# Altium PCB StandaloneLeakDetector.PcbDoc
Units mil, origin at the board's own origin, x right, y up, seen from the top; angles counter-clockwise.
Board outline 1280 x 1360 mil, 2 copper layers (Top Layer, Bottom Layer); 12 components, 7 nets, 37 pads, 4 vias.
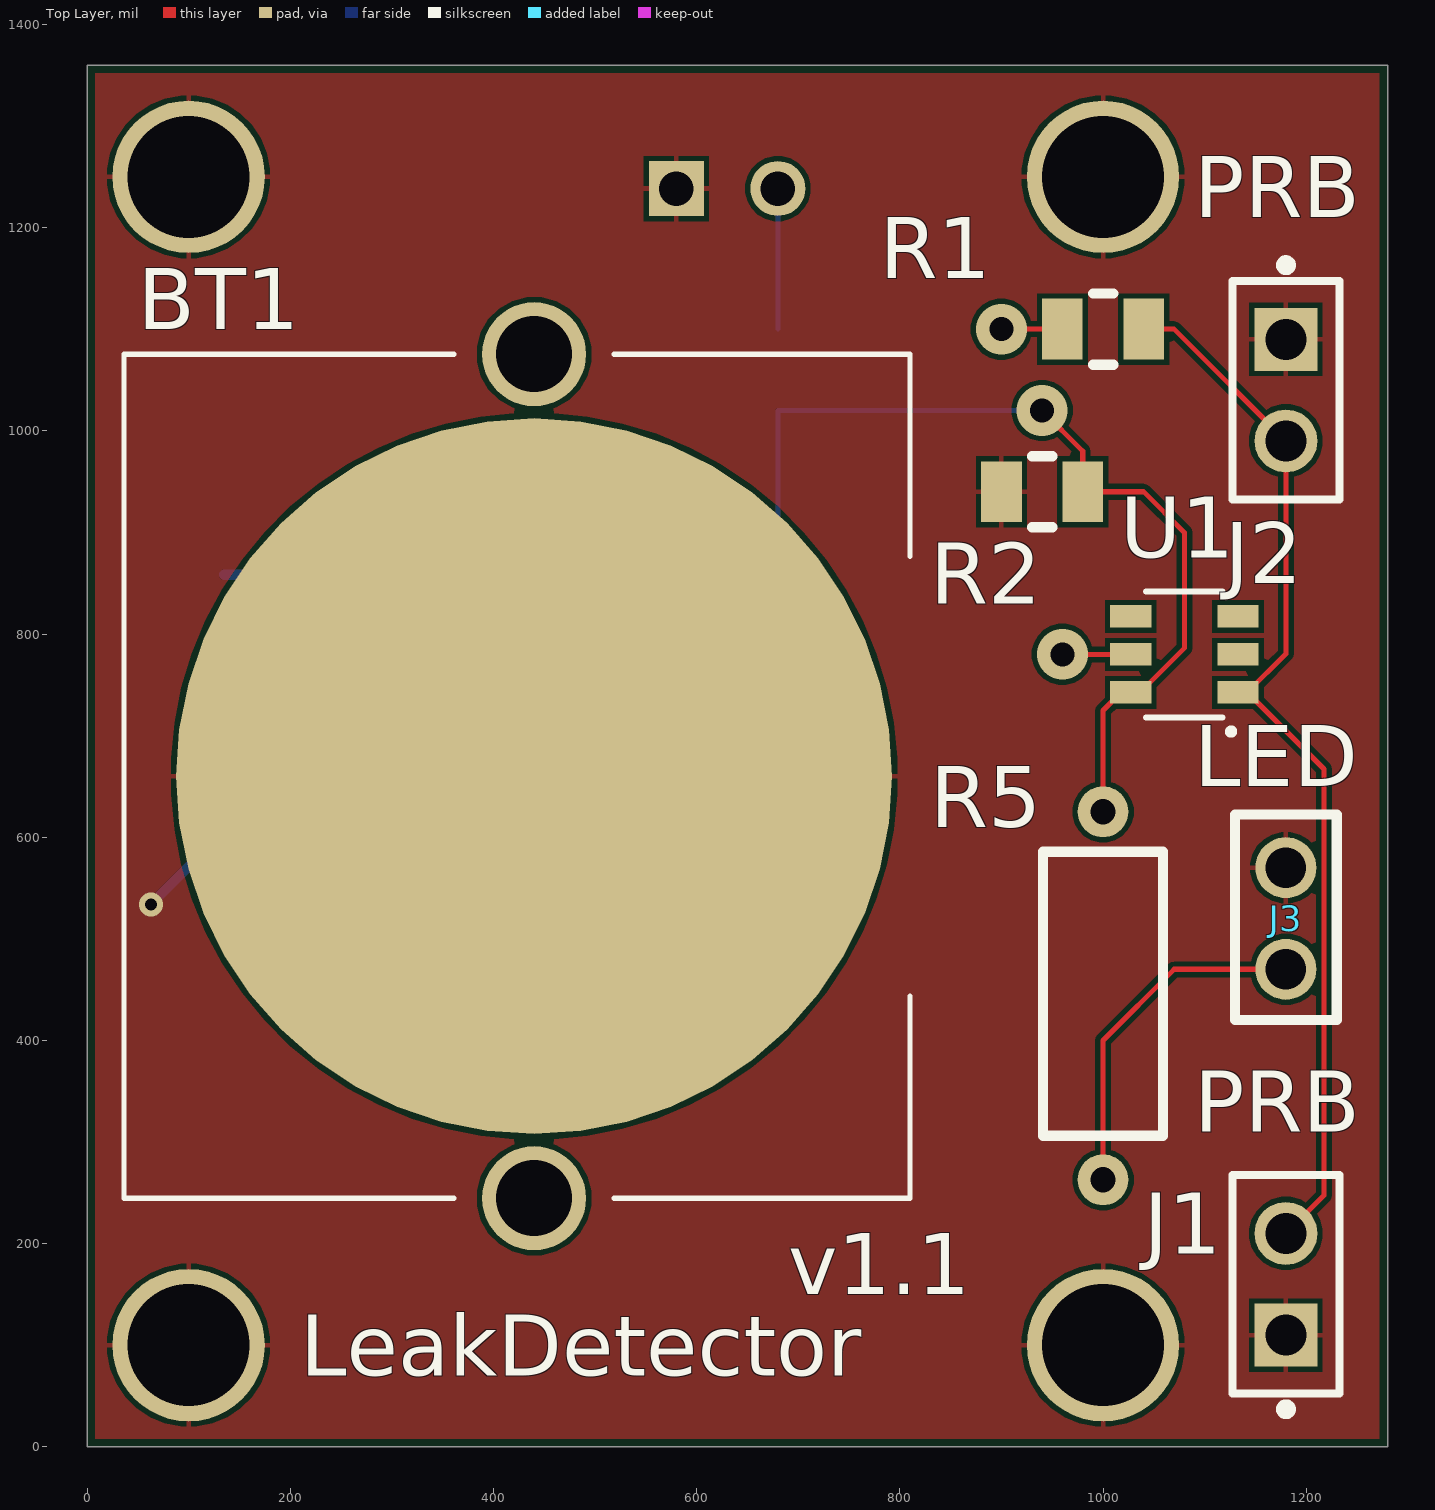
[diagram p0: Top Layer view]
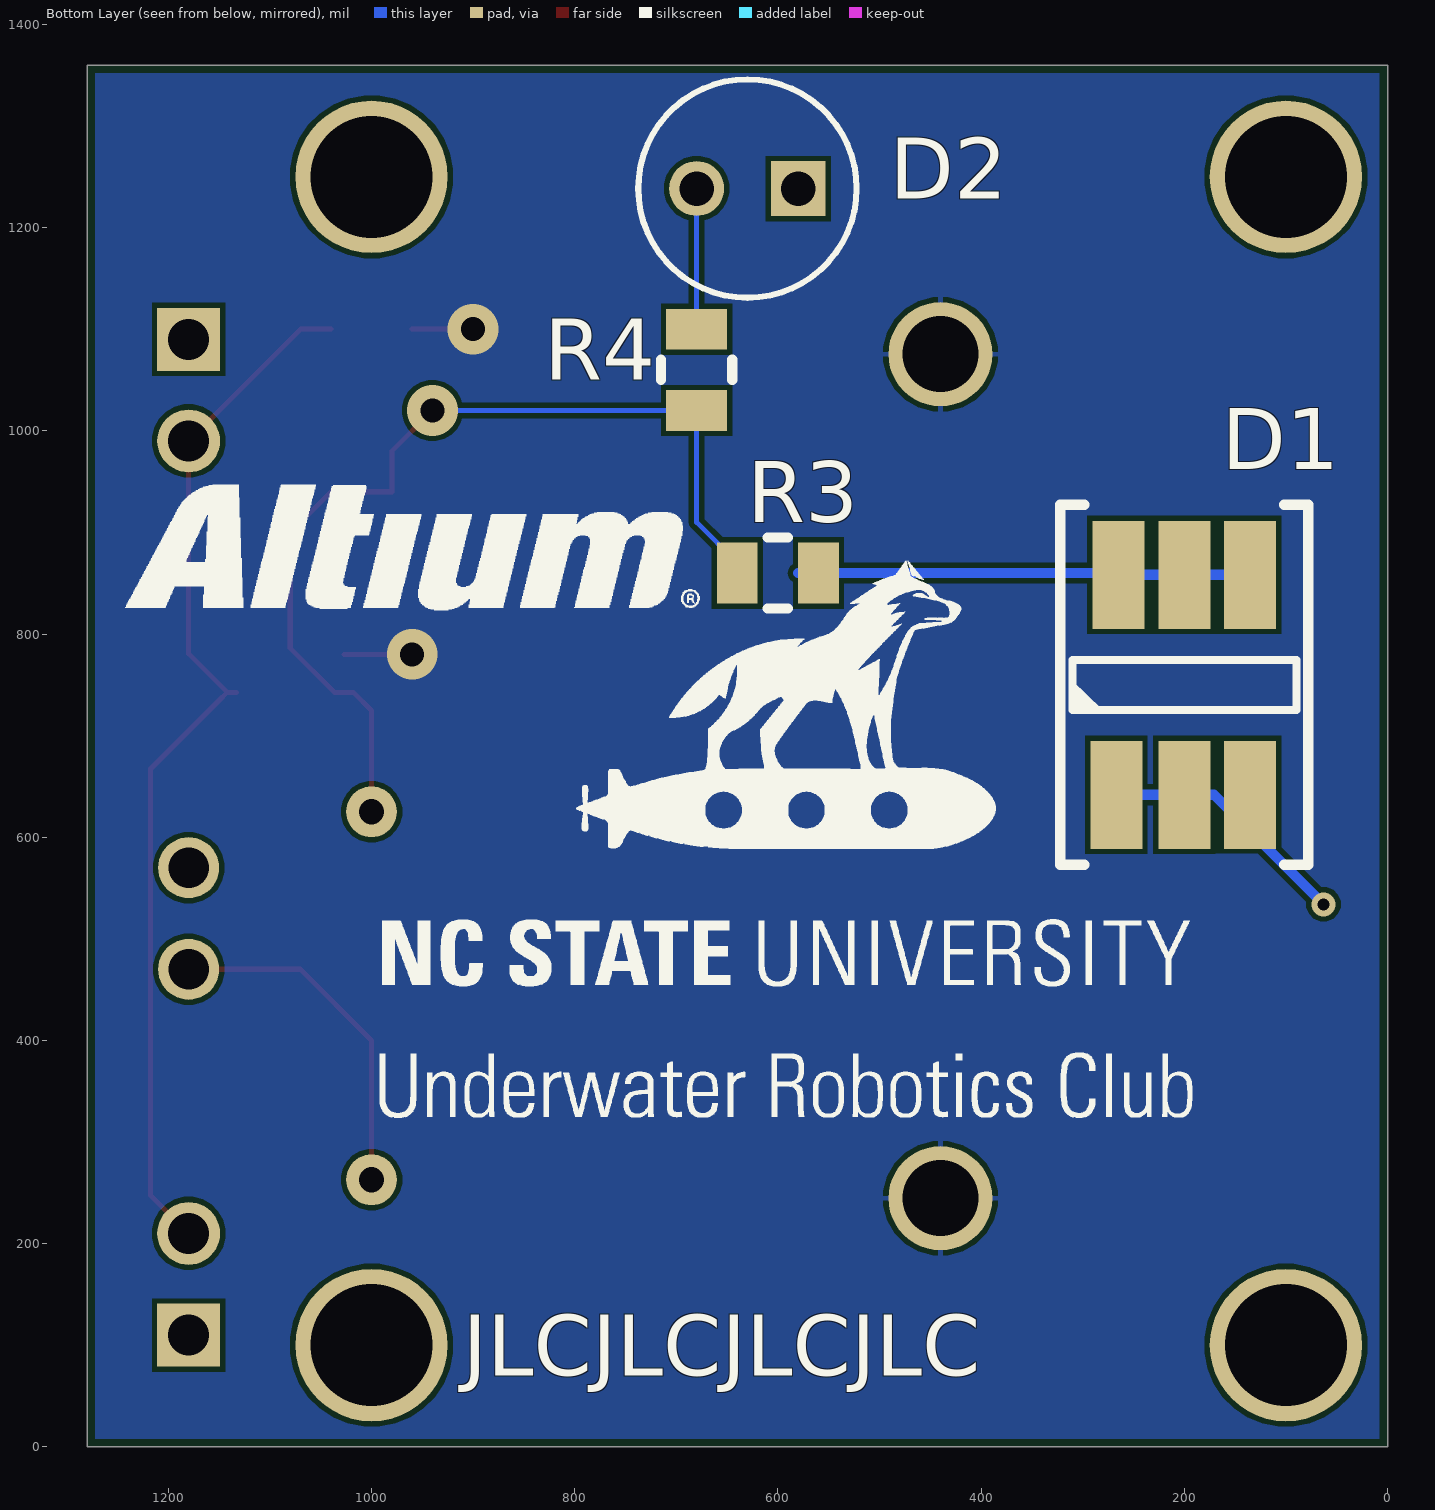
[diagram p1: Bottom Layer view, seen from below]
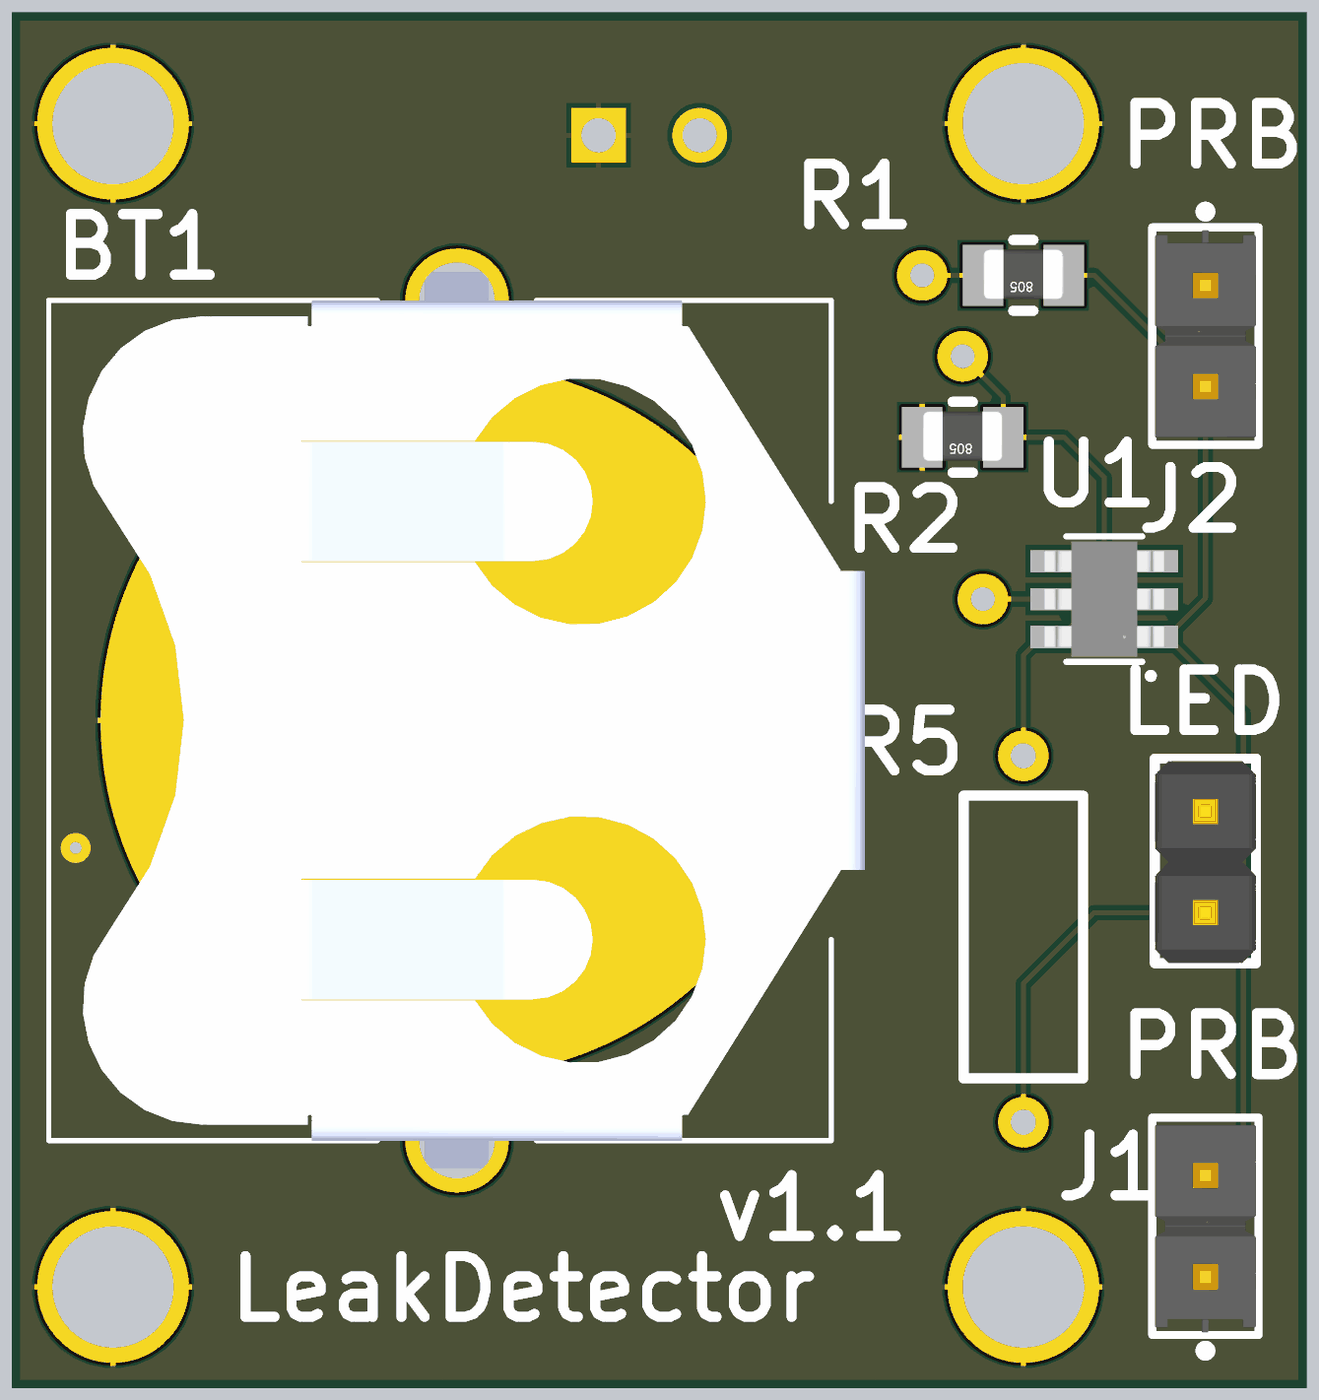
[diagram p2: 3D render of the assembled board from above, using the file's embedded part models]
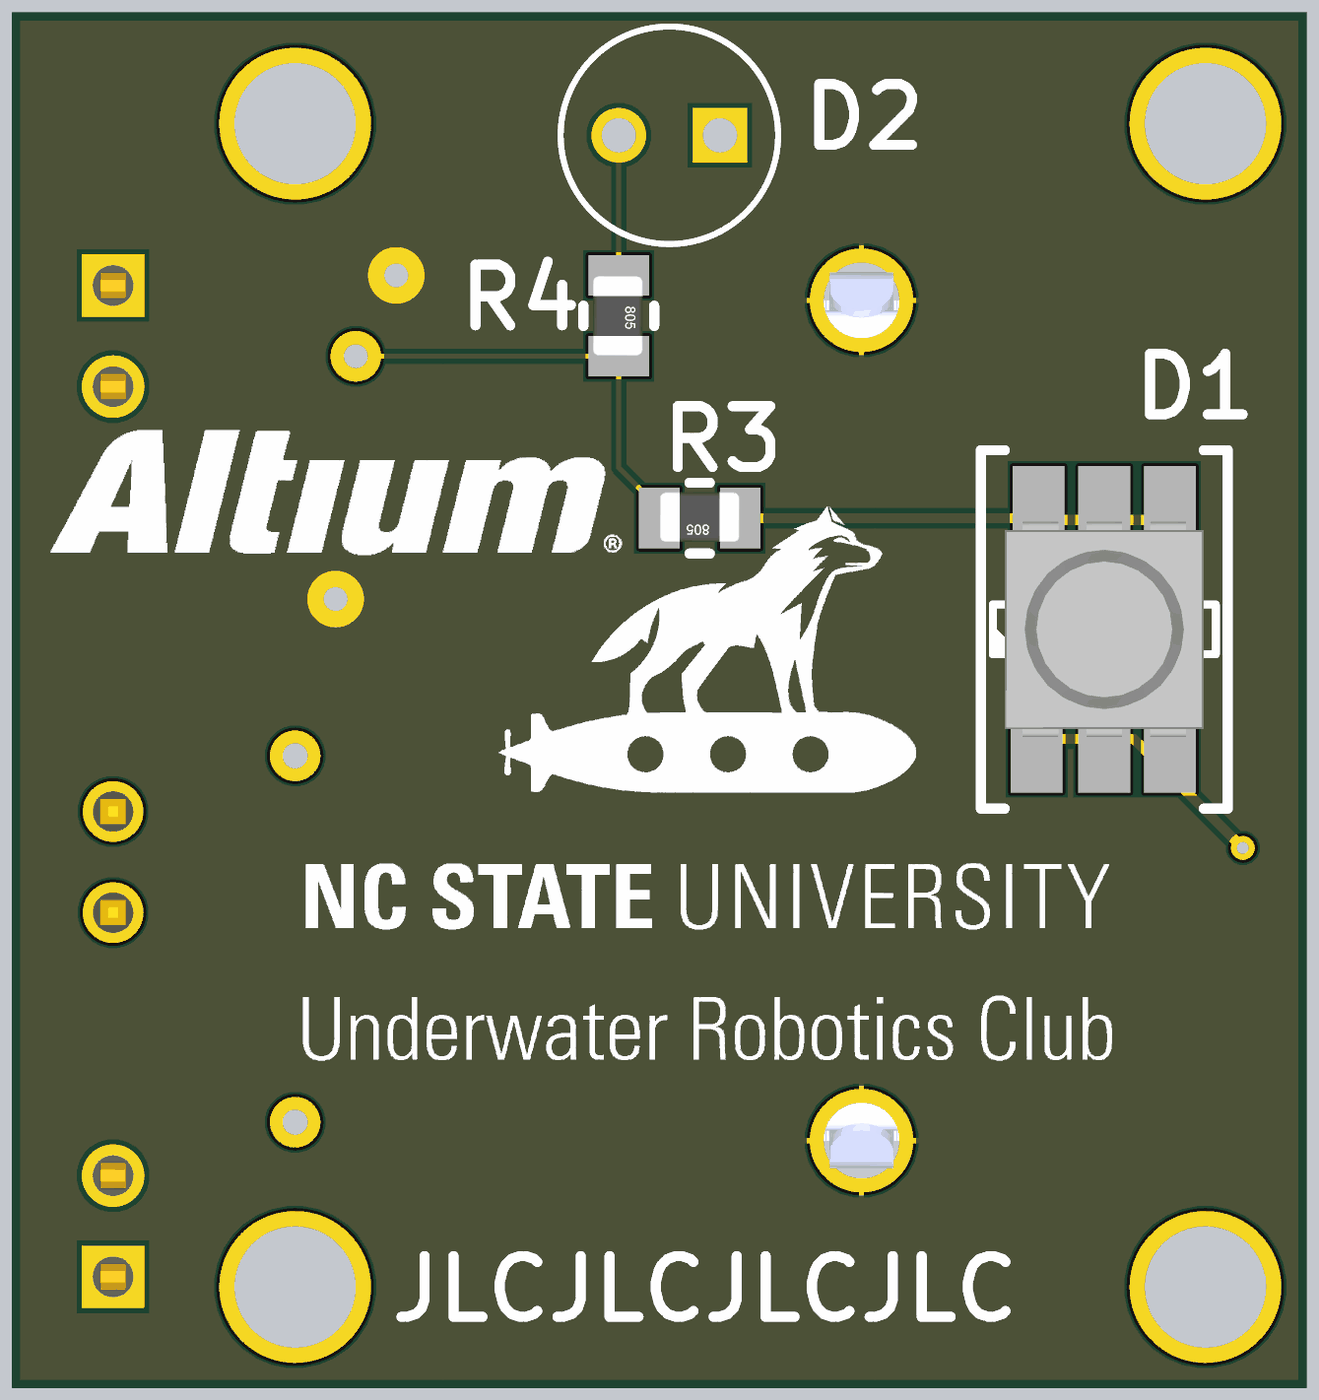
[diagram p3: 3D render of the assembled board from below, using the file's embedded part models]

## Layer stack, top to bottom
Top Solder: solder mask 0.4, Solder Resist, Dk 3.5
Top Layer: signal copper 1.4
Dielectric 1: dielectric 12.6, FR-4, Dk 4.8
Bottom Layer: signal copper 1.4
Bottom Solder: solder mask 0.4, Solder Resist, Dk 3.5

## Board outline
0,0 0,1360 1280,1360 1280,0

## Design rules (kind name [scope] priority, off if disabled: settings)
BoardOutlineClearance [All] p1: gap=7.87 ignorepadtopadclearanceinfootprint=FALSE
Clearance [All] p1: gap=5 ignorepadtopadclearanceinfootprint=FALSE except(9.84: Arc-Hole Track-Hole SMDPad-Hole THPad-Hole Via-Hole Fill-Hole Poly-Hole Region-Hole Text-Hole)
ComponentClearance [All] p1: gap=5 collisioncheckmode=3 verticalgap=5 showdistances=TRUE
DiffPairsRouting [All] p1: maxlimit=10 minlimit=5 mostfreqgap=5 toplayer_minwidth=5 toplayer_maxwidth=1000 toplayer_prefwidth=5 bottomlayer_minwidth=5 bottomlayer_maxwidth=1000 bottomlayer_prefwidth=5 maxuncoupledlength=500
Height [All] p1: minheight=0 maxheight=71497.94 prefheight=500
HoleSize [All] p1: absolutevalues=TRUE maxlimit=248.03 minlimit=11.81 maxpercent=80.000 minpercent=20.000
HoleToHoleClearance [All] p1: gap=9.84 allowstackedmicrovias=FALSE
MinimumAnnularRing [All] p1: minimumring=3
MinimumSolderMaskSliver [All] p1: minsoldermaskwidth=0
PlaneClearance [All] p1: clearance=5
PlaneConnect PlaneConnectPowerPads [InPadClass('PowerPads')] p1: planeconnectstyle=Direct reliefexpansion=20 reliefentries=4 reliefconductorwidth=10 reliefairgap=10
PlaneConnect [All] p2: pad.planeconnectstyle=Relief pad.reliefexpansion=11.81 pad.reliefentries=4 pad.reliefconductorwidth=5 pad.reliefairgap=5 via.planeconnectstyle=Direct via.reliefexpansion=11.81 via.reliefentries=4 via.reliefconductorwidth=5 via.reliefairgap=5
PolygonConnect PolygonConnectPowerPads [All vs (InPadClass('PowerPads'))] p1: connectstyle=Direct reliefconductorwidth=10 reliefentries=4 polygonreliefangle="90 Angle" airgapwidth=10
PolygonConnect [All] p2: thpad.connectstyle=Relief thpad.reliefconductorwidth=5 thpad.reliefentries=4 thpad.polygonreliefangle="90 Angle" thpad.airgapwidth=5 smdpad.connectstyle=Relief smdpad.reliefconductorwidth=5 smdpad.reliefentries=4 smdpad.polygonreliefangle="90 Angle" smdpad.airgapwidth=5 via.connectstyle=Direct via.reliefconductorwidth=5 via.reliefentries=4 via.polygonreliefangle="90 Angle" via.airgapwidth=5
RoutingVias [All] p1: holewidth=11.81 width=23.62 viastyle="Through Hole" minholewidth=11.81 minwidth=23.62 maxholewidth=23.62 maxwidth=259.84
SilkToSilkClearance [All] p1: silktosilkclearance=0
SilkToSolderMaskClearance [IsPad] p1: minsilkscreentomaskgap=5 clearancetoexposedcopper=TRUE
SolderMaskExpansion [All] p1: expansion=2.95 istentingtop=FALSE
Width [All] p1: maxlimit=1000 minlimit=5 preferedwidth=5 minimp=50.000000 maximp=50.000000 favimp=50.000000
20 further rules are at their usual default settings.

## Components (designator, comment, footprint, x,y, rotation, side; value= is the part's Value field where it differs from the comment)
BT1 "BAT-HLD-005-THM" BAT_BAT-HLD-005-THM 440,660 r90 top
D1 "SMTL6-RC" SMTL6-RC 200,750 r90 bottom
D2 "HLMP-EG15-UX000" LED_AVAGO_HLMP_XX15_AVA 580,1238.46 r0 bottom
J1 "TSW-102-07-L-S" FP-TSW-102-07-L-S-MFG 1180,160 r90 top
J2 "TSW-102-07-L-S" FP-TSW-102-07-L-S-MFG 1180,1040 r270 top
J3 "Header" "1x2 Header" 1180,520 r90 top
R1 "1M" SMD-0805-RES 1000,1100 r90 top
R2 "10k" SMD-0805-RES 940,940 r90 top
R3 "20" SMD-0805-RES 600,860 r90 bottom
R4 "51" SMD-0805-RES 680,1060 r0 bottom
R5 "RES_0.5W_THT" RES_0.5W_THT 1000,625.04 r270 top
U1 "QS6J11TR" TRANS_QS6_ROM 1080,780 r180 top

## Footprints (in the part's own frame and the unit in brackets; to place one, negate y for a bottom-side part, rotate by r counter-clockwise, add the part's x,y. Pads: shape width x height; smd on the part's side, far side on the other; paste and mask are expansions set on the pad)
"1x2 Header" [mil]
  round 60 hole 40: 1(-50,0) 2(50,0)
  silkscreen extent -100,-50 102,50, body extent -100,-50 100,50, height 374
BAT_BAT-HLD-005-THM [mm]
  round 17.9 smd paste-10: N(0,0)
  round 2.6 hole 1.9: P1(-10.55,0) P2(10.55,0)
  silkscreen extent -10.55,-9.4 10.55,10.25, body extent -11.24,-10.25 11.24,9.4, height 3.6
FP-TSW-102-07-L-S-MFG [mm]
  rect 1.57x1.57 hole 1.02 paste-1000 mask+0: 1(-1.27,0)
  round 1.57 hole 1.02 paste-1000 mask+0: 2(1.27,0)
  silkscreen extent -3.25,-1.34 2.73,1.34, body extent -2.83,-1.44 2.83,1.44, height 0.25
LED_AVAGO_HLMP_XX15_AVA [mil]
  rect 54x54 hole 34 mask+0: 1(0,0)
  round 54 hole 34 mask+0: 2(100,0)
  silkscreen extent -58,-108 158,108
RES_0.5W_THT [mm] "Standard 0.5W through hole resistor"
  round 1.27 hole 0.635: 1(0,0) 2(9.2,0)
  silkscreen extent 1,-1.5 8.1,1.5
SMD-0805-RES [mil]
  rect 60x40 smd: 1(0,40) 2(0,-40)
  silkscreen extent -35,-10 35,10, body extent -24,-39 26,39, height 31
SMTL6-RC [mm]
  rect 2.7x1.3 smd: 1(-2.75,-1.648) 2(2.75,-1.648) 3(-2.75,0) 4(2.75,0) 5(-2.75,1.699) 6(2.75,1.648)
  silkscreen extent -4.5,-3.1 4.5,3.1, body extent -2.7,-2.5 2.7,2.5, height 1.53
TRANS_QS6_ROM [mil]
  rect 40.5x22 smd paste+0 mask+0: 1(-52.75,37.4) 2(-52.75,0) 3(-52.75,-37.4) 4(52.75,-37.4) 5(52.75,0) 6(52.75,37.4)
  silkscreen extent -47,-62 38,77, body extent -59,-57 59,57, height 39

## Part data
BT1: "Battery Retainer Coin, 20.0mm 1 Cell PC Pin", Package=None, Availability="In Stock", Check_prices=https://www.snapeda.com/parts/BAT-HLD-005-THM/Linx/view-part/?ref=eda, MF="Linx Technologies Inc.", MP=BAT-HLD-005-THM, Price=None, Purchase-URL=https://pricing.snapeda.com/search/part/BAT-HLD-005-THM/?ref=eda, SnapEDA_Link=https://www.snapeda.com/parts/BAT-HLD-005-THM/Linx/view-part/?ref=snap
D2: "No Description Available", Mfr_Name="Avago Technologies", Copyright="Copyright (C) 2022 Ultra Librarian. All rights reserved.", Digi-Key_Part_Number_1=HLMP-EG15-UX000-ND, Digi-Key_Part_Number_2=516-HLMP-EG15-UX000-ND, Manufacturer_Part_Number=HLMP-EG15-UX000, RefDes=RefDes, Type=DEV
J1 J2: library part CMP-02766-001428-1, "CONN HEADER VERT 2POS 2.54MM", Color=Black, Current Rating=7.6A, Max Operating Temperature=125°C, Max Voltage Rating (AC)=550V, Min Operating Temperature=-55°C, Package Quantity=1, Connector Type="Male Pin", Contact Material=Bronze, Contact Mating Length=0.23inch, Contact Plating=Gold, Contact Type="Male Pin", Depth=2.54mm, Gender=Male, Housing Color=Black, Housing Material=Polyester, Lead Free="Lead Free", Length=5.08mm, Max Current Rating=7.6A, Mount="Through Hole", Number of Contacts=2, Number of Positions=2, Number of Rows=1, Orientation=Straight, Packaging=Bulk, Pitch=2.54mm, Radiation Hardening=No, REACH SVHC="No SVHC", RoHS Compliant=Yes, Series=TSW, Termination=Solder, Voltage Rating=550V, Width=2.54mm
J3: library part "1x2 Header", "CONN HEADER VERT 2POS 2.54MM"
R1: library part ERJ-6ENF1004V, "RES SMD 1M OHM 1% 1/8W 0805", Digi-Key Part Number=P1.00MCCT-ND, Manufacturer="Panasonic Electronic Components", Operating Temperature="-55°C ~ 155°C", Package / Case="0805 (2012 Metric)", Power (Watts)="0.125W, 1/8W", Supplier Device Package=0805, Temperature Coefficient=±100ppm/°C, Tolerance=±1%, @ qty=1500, Composition="Thick Film", Datasheets=http://industrial.panasonic.com/www-cgi/jvcr13pz.cgi?E+PZ+3+AOA0002+ERJ6ENF1004V+7+WW, Factory Stock=0, Failure Rate=-, Features="Automotive AEC-Q200", Height - Seated (Max)="0.028\" (0.70mm)", Image=//media.digikey.com/Renders/Panasonic%20Renders/ERJ-0805%20Pkg.jpg, Minimum Quantity=1, Number of Terminations=2, Packaging="Cut Tape (CT)", Part Number=ERJ-6ENF1004V, Part Status=Active, Quantity Available=710452, Series=ERJ, Size / Dimension="0.079\" L x 0.049\" W (2.00mm x 1.25mm)", Unit Price (USD)=0.00729
R2: library part ERJ-6ENF1002V, "RES SMD 10K OHM 1% 1/8W 0805", Digi-Key Part Number=P10.0KCCT-ND, Manufacturer="Panasonic Electronic Components", Operating Temperature="-55°C ~ 155°C", Package / Case="0805 (2012 Metric)", Power (Watts)="0.125W, 1/8W", Supplier Device Package=0805, Temperature Coefficient=±100ppm/°C, Tolerance=±1%, @ qty=1500, Composition="Thick Film", Datasheets=http://industrial.panasonic.com/www-cgi/jvcr13pz.cgi?E+PZ+3+AOA0002+ERJ6ENF1002V+7+WW, Factory Stock=0, Failure Rate=-, Features="Automotive AEC-Q200", Height - Seated (Max)="0.028\" (0.70mm)", Image=//media.digikey.com/Renders/Panasonic%20Renders/ERJ-0805%20Pkg.jpg, Minimum Quantity=1, Number of Terminations=2, Packaging="Cut Tape (CT)", Part Number=ERJ-6ENF1002V, Part Status=Active, Quantity Available=3985614, Series=ERJ, Size / Dimension="0.079\" L x 0.049\" W (2.00mm x 1.25mm)", Unit Price (USD)=0.00729
R3: library part ERJ-6ENF20R0V, "RES SMD 20 OHM 1% 1/8W 0805", Digi-Key Part Number=P20.0CCT-ND, Manufacturer="Panasonic Electronic Components", Operating Temperature="-55°C ~ 155°C", Package / Case="0805 (2012 Metric)", Power (Watts)="0.125W, 1/8W", Supplier Device Package=0805, Temperature Coefficient=±100ppm/°C, Tolerance=±1%, @ qty=1500, Composition="Thick Film", Datasheets=http://industrial.panasonic.com/www-cgi/jvcr13pz.cgi?E+PZ+3+AOA0002+ERJ6ENF20R0V+7+WW, Factory Stock=0, Failure Rate=-, Features="Automotive AEC-Q200", Height - Seated (Max)="0.028\" (0.70mm)", Image=//media.digikey.com/Renders/Panasonic%20Renders/ERJ-0805%20Pkg.jpg, Minimum Quantity=1, Number of Terminations=2, Packaging="Cut Tape (CT)", Part Number=ERJ-6ENF20R0V, Part Status=Active, Quantity Available=328732, Series=ERJ, Size / Dimension="0.079\" L x 0.049\" W (2.00mm x 1.25mm)", Unit Price (USD)=0.00729
R4: library part ERJ-6GEYJ510V, "RES SMD 51 OHM 5% 1/8W 0805", Digi-Key Part Number=P51ACT-ND, Manufacturer="Panasonic Electronic Components", Operating Temperature="-55°C ~ 155°C", Package / Case="0805 (2012 Metric)", Power (Watts)="0.125W, 1/8W", Supplier Device Package=0805, Temperature Coefficient=±200ppm/°C, Tolerance=±5%, @ qty=1500, Composition="Thick Film", Datasheets=http://industrial.panasonic.com/www-cgi/jvcr13pz.cgi?E+PZ+3+AOA0001+ERJ6GEYJ510V+7+WW, Factory Stock=0, Failure Rate=-, Features="Automotive AEC-Q200", Height - Seated (Max)="0.028\" (0.70mm)", Image=//media.digikey.com/Renders/Panasonic%20Renders/ERJ-0805%20Pkg.jpg, Minimum Quantity=1, Number of Terminations=2, Packaging="Cut Tape (CT)", Part Number=ERJ-6GEYJ510V, Part Status=Active, Quantity Available=280102, Series=ERJ, Size / Dimension="0.079\" L x 0.049\" W (2.00mm x 1.25mm)", Unit Price (USD)=0.00496
R5: "Generic 0.5W through hole resistor"
U1: "No Description Available", Mfr_Name="ROHM Semiconductor", Copyright="Copyright (C) 2022 Ultra Librarian. All rights reserved.", Digi-Key_Part_Number_1=QS6J11CT-ND, Digi-Key_Part_Number_2=QS6J11DKR-ND, Digi-Key_Part_Number_3=QS6J11TR-ND, Manufacturer_Part_Number=QS6J11TR, RefDes=RefDes, Type=DEV

## Free pads (board coordinates)
  round 150 hole 120: 1(100,1250) 2(100,100) 3(1000,100) 4(1000,1250)

## Via types
v1: diameter 50, hole 23.62, Top Layer to Bottom Layer, 3 vias
v2: diameter 23.62, hole 11.81, Top Layer to Bottom Layer, 1 vias

## Nets (pads, with @x,y where several pads share a name; then routed paths per layer and width w, separated by ;. In a path a pad name is that pad's centre, name@x,y a point inside that pad or via, vN(x,y) a via of type N, cw(c..) or ccw(c..) an arc to the next point about the centre after c; other vN are vias at no path point)
3V3: BT1.P1 BT1.P2 R1.1 U1.5 | length 127.2
  Top Layer w5: v1(900,1100) R1.1 ; v1(960,780) U1.5
GND: BT1.N D1.1 D1.3 D1.5 D2.1 J1.1 J2.1 J3.2 pad.1 pad.2 pad.3 pad.4 R2.1 | length 248.5
  Bottom Layer w10: v2(63,534) 170.73,641.73 D1.3 D1.5
LEAK_IN: J1.2 J2.2 R1.2 U1.1 | length 1037.4
  Top Layer w5: R1.2 1070,1100 J2.2 1180,780.6 U1.1@1142,742.6 ; U1.1 U1.1@1142,742.6 ; J1.2 1217.5,247.5 1217.5,667.1 1150.5,734.1 U1.1@1142,742.6
LEAK_OUT: R2.2 R3.1 R4.1 R5.1 U1.6 | length 968.6
  Top Layer w5: v1(940,1020) 980,980 R2.2 1040,940 1080,900 1080,786.1 1036.5,742.6 U1.6 1018,742.6 1000,724.6 R5.1
  Bottom Layer w5: R3.1 640,870 680,910 R4.1 v1(940,1020)
NetD1_2: D1.2 D1.4 D1.6 R3.2 | length 445.6
  Bottom Layer w10: D1.2 D1.4 D1.6 266.61,860 580,860
NetD2_2: D2.2 R4.2 | length 138.5
  Bottom Layer w5: R4.2 D2.2
NetJ3_1: J3.1 R5.2 | length 346.2
  Top Layer w5: R5.2 1000,400 1070,470 J3.1
pads on no net: U1.2 U1.3 U1.4

## Polygon pours and split planes (outlines as drawn)
GND on Top Layer "GND_L01_P002" (solid, pour order 2): 0,1360 1280,1360 1280,0 0,0
3V3 on Bottom Layer "3V3_L02_P003" (solid, pour order 3): 0,1360 1280,1360 1280,0 0,0

## Silkscreen, mask and mechanical layers (free items; w line width, h text height)
Top Overlay:
  text "PRB" at 1090,1210 h60
  text "LED" at 1090,650 h60
  text "PRB" at 1090,310 h60
  text "v1.1" at 690,150 h60
  text "LeakDetector" at 210,70 h60
Bottom Overlay:
  drawing of 49 lines, arcs and shapes, not listed
  text "JLCJLCJLCJLC" at 910,70 h60
Mechanical 1:
  the board outline again, w10